# EAGLE board CT_schematic (EAGLE 7.6.0)

Size 100 x 80 mm. Coordinates in mm from the lower left corner, seen from the top.
Outline: 0,0 100,0 100,80 0,80 0,0
Copper layers (1*16): Top 0.035mm / dielectric 1.5mm / Bottom 0.035mm
Design rules "default": minimum track width 10mil, minimum drill 24mil, track to track 8mil, track to pad 8mil, pad to pad 8mil, via to via 8mil, smd to smd 8mil, copper to edge 40mil, drill to drill 8mil, minimum pad ring 10mil, minimum via ring 8mil, stop-mask expansion 4mil, vias tented up to drill 0mil, thermal gap 10mil

## Footprints (pad centres in the part's own frame; a part is rotated, then mirrored left to right if it is on the bottom)
C0603 = smd 0.8 x 0.8: 1 -0.762,0; 2 0.762,0
C0402 = smd 0.5 x 0.5: 1 -0.508,0; 2 0.508,0
C1210 = smd 1.2 x 2.5: 1 -1.524,0; 2 1.524,0
EXV-9H = smd 3.505 x 1.676: 1 -2.857,0; 2 2.857,0
PJ-037B_PACKAGE = drill 3.7 square: 1 12,0 | drill 3.2 square: 2 6,0
R0603 = smd 0.8 x 0.8: 1 -0.762,0; 2 0.762,0
WLCSP104 = smd 0.229 x 0.229: A1 -1.6,2.2; A2 -1.2,2.2; A3 -0.8,2.2; A4 -0.4,2.2; A5 0,2.2; A6 0.4,2.2; A7 0.8,2.2; A8 1.2,2.2; A9 1.6,2.2; B1 -1.6,1.8; B2 -1.2,1.8; B3 -0.8,1.8; B4 -0.4,1.8; B5 0,1.8; B6 0.4,1.8; B7 0.8,1.8; B8 1.2,1.8; B9 1.6,1.8; C1 -1.6,1.4; C2 -1.2,1.4; C3 -0.8,1.4; C4 -0.4,1.4; C5 0,1.4; C6 0.4,1.4; C7 0.8,1.4; C8 1.2,1.4; C9 1.6,1.4; D1 -1.6,1; D2 -1.2,1; D3 -0.8,1; D4 -0.4,1; D5 0,1; D6 0.4,1; D7 0.8,1; D8 1.2,1; D9 1.6,1; E1 -1.6,0.6; E2 -1.2,0.6; E3 -0.8,0.6; E4 -0.4,0.6; E6 0.4,0.6; E7 0.8,0.6; E8 1.2,0.6; E9 1.6,0.6; F1 -1.6,0.2; F2 -1.2,0.2; F3 -0.8,0.2; F4 -0.4,0.2; F6 0.4,0.2; F7 0.8,0.2; F8 1.2,0.2; F9 1.6,0.2; G1 -1.6,-0.2; G2 -1.2,-0.2; G3 -0.8,-0.2; G4 -0.4,-0.2; G6 0.4,-0.2; G7 0.8,-0.2; G8 1.2,-0.2; G9 1.6,-0.2; H1 -1.6,-0.6; H2 -1.2,-0.6; H3 -0.8,-0.6; H4 -0.4,-0.6; H6 0.4,-0.6; H7 0.8,-0.6; H8 1.2,-0.6; H9 1.6,-0.6; J1 -1.6,-1; J2 -1.2,-1; J3 -0.8,-1; J4 -0.4,-1; J5 0,-1; J6 0.4,-1; J7 0.8,-1; J8 1.2,-1; J9 1.6,-1; K1 -1.6,-1.4; K2 -1.2,-1.4; K3 -0.8,-1.4; K4 -0.4,-1.4; K5 0,-1.4; K6 0.4,-1.4; K7 0.8,-1.4; K8 1.2,-1.4; K9 1.6,-1.4; L1 -1.6,-1.8; L2 -1.2,-1.8; L3 -0.8,-1.8; L4 -0.4,-1.8; L5 0,-1.8; L6 0.4,-1.8; L7 0.8,-1.8; L8 1.2,-1.8; L9 1.6,-1.8; M1 -1.6,-2.2; M2 -1.2,-2.2; M3 -0.8,-2.2; M4 -0.4,-2.2; M5 0,-2.2; M6 0.4,-2.2; M7 0.8,-2.2; M8 1.2,-2.2; M9 1.6,-2.2
SAMTEC_FTSH-105-01-L-DV-K = smd 0.762 x 2.794: 1 -2.54,-2.032; 2 -2.54,2.032; 3 -1.27,-2.032; 4 -1.27,2.032; 5 0,-2.032; 6 0,2.032; 7 1.27,-2.032; 8 1.27,2.032; 9 2.54,-2.032; 10 2.54,2.032
SOIC-8 = smd 1.6 x 0.6: 1 -2.7,1.905 | smd 1.55 x 0.6: 2 -2.7,0.635; 3 -2.7,-0.635; 4 -2.7,-1.905; 5 2.7,-1.905; 6 2.7,-0.635; 7 2.7,0.635; 8 2.7,1.905
ASEK = smd 1.4 x 1: 1 -1.1,-0.8; 2 1.1,-0.8; 3 1.1,0.8; 4 -1.1,0.8
ASFL1 = smd 1.7 x 1.5: 1 -1.27,-1.1; 2 1.27,-1.1; 3 1.27,1.1; 4 -1.27,1.1
WSON-8 = smd 0.3 x 0.6: 1 -0.75,0; 2 0.05,0; 3 0.85,0; 4 1.65,0; 5 1.65,3.8; 6 0.85,3.8; 7 0.05,3.8; 8 -0.75,3.8 | smd 3 x 2.6: PAD 0.45,1.9
SON-6 = smd 0.55 x 0.3: 1 -0.355,0.5 | smd 0.52 x 0.3: 2 -0.37,0; 3 -0.37,-0.5; 4 0.37,-0.5; 5 0.37,0; 6 0.37,0.5
SW_4-1437565-2 = smd 1.4 x 2.1: 1 -2.23,4.55; 2 -2.23,-4.55; 3 2.23,4.55; 4 2.23,-4.55
LGM67K-G1J2-24-Z = smd 0.8 x 1.4: A -2,0; C 0,0
NC7SZ125M5X = smd 1.3 x 0.7: 1 -1.3,0.95; 2 -1.3,0; 3 -1.3,-0.95; 4 1.3,-0.95; 5 1.3,0.95
DUMMY_PACKAGE_121 = drill 0.3: 1 0,-1; 2 1.5,-1; 3 3,-1

## Placement (x,y rotation side)
C1  1e-07  [C0603]  -58.42,53.34 0 top  (outside the outline)
C2  1e-07  [C0603]  -62.23,53.34 0 top  (outside the outline)
C3  1e-07  [C0603]  -15.24,58.42 0 top  (outside the outline)
C4  1e-07  [C0603]  -19.05,58.42 0 top  (outside the outline)
C5  1e-07  [C0603]  -22.86,58.42 0 top  (outside the outline)
C6  1e-07  [C0603]  -26.67,58.42 0 top  (outside the outline)
C7  1e-07  [C0603]  -30.48,58.42 0 top  (outside the outline)
C8  4.7e-06  [C0603]  -54.61,53.34 0 top  (outside the outline)
C9  1e-07  [C0603]  -34.29,58.42 0 top  (outside the outline)
C10  1e-08  [C0603]  -38.1,58.42 0 top  (outside the outline)
C11  1e-06  [C0603]  -41.91,58.42 0 top  (outside the outline)
C12  1e-07  [C0402]  -26.67,63.5 0 top  (outside the outline)
C13  1e-08  [C0402]  -30.48,63.5 0 top  (outside the outline)
C14  1e-08  [C0402]  -34.29,63.5 0 top  (outside the outline)
C15  1e-08  [C0402]  -38.1,63.5 0 top  (outside the outline)
C16  1e-08  [C0402]  -41.91,63.5 0 top  (outside the outline)
C17  1e-05  [C1210]  -29.21,46.99 0 top  (outside the outline)
C18  1e-05  [C1210]  -35.56,46.99 0 top  (outside the outline)
C19  1e-07  [C0402]  -45.72,63.5 0 top  (outside the outline)
C20  0.0001  [EXV-9H]  -38.1,39.37 0 top  (outside the outline)
C21  0.0001  [EXV-9H]  -49.53,39.37 0 top  (outside the outline)
C22  1e-08  [C0402]  -49.53,63.5 0 top  (outside the outline)
C23  1e-08  [C0402]  -53.34,63.5 0 top  (outside the outline)
J1  PJ-037B  [PJ-037B_PACKAGE]  -57.15,7.62 0 top  (outside the outline)
R2  1000.0  [R0603]  -45.72,58.42 0 top  (outside the outline)
R4  4700.0  [R0603]  -49.53,58.42 0 top  (outside the outline)
R5  2200.0  [R0603]  -53.34,58.42 0 top  (outside the outline)
R6  2200.0  [R0603]  -57.15,58.42 0 top  (outside the outline)
R7  10000.0  [R0603]  -15.24,53.34 0 top  (outside the outline)
R8  10000.0  [R0603]  -20.32,53.34 0 top  (outside the outline)
R9  10000.0  [R0603]  -25.4,53.34 0 top  (outside the outline)
R10  10000.0  [R0603]  -30.48,53.34 0 top  (outside the outline)
R11  10000.0  [R0603]  -35.56,53.34 0 top  (outside the outline)
R12  5.0  [R0603]  -60.96,58.42 0 top  (outside the outline)
R13  10000.0  [R0603]  -40.64,53.34 0 top  (outside the outline)
R14  100000.0  [R0603]  -53.34,45.72 0 top  (outside the outline)
R15  2231.0  [R0603]  -15.24,63.5 0 top  (outside the outline)
R16  1000.0  [R0603]  -19.05,63.5 0 top  (outside the outline)
R17  10000.0  [R0603]  -45.72,53.34 0 top  (outside the outline)
R18  10000.0  [R0603]  -50.8,53.34 0 top  (outside the outline)
R19  9100.0  [R0603]  -22.86,63.5 0 top  (outside the outline)
R20  680000.0  [R0603]  -58.42,45.72 0 top  (outside the outline)
R21  120000.0  [R0603]  -63.5,45.72 0 top  (outside the outline)
U1  STM32L162VDY6X  [WLCSP104]  -53.34,30.48 0 top  (outside the outline)
U2  FTSH-105-01-L-DV-K  [SAMTEC_FTSH-105-01-L-DV-K]  -35.56,7.62 0 top  (outside the outline)
U3  M24M02-DRMN6TP  [SOIC-8]  -44.45,19.05 0 top  (outside the outline)
U4  ASEK-32.768KHz-ECST  [ASEK]  -29.21,39.37 0 top  (outside the outline)
U5  ASFL1-25MHZ-NCS  [ASFL1]  -46.99,30.48 0 top  (outside the outline)
U6  LP3878SDX-ADJ/NOPB  [WSON-8]  -30.48,29.21 0 top  (outside the outline)
U7  TPS3895ADRYR  [SON-6]  -13.97,67.31 0 top  (outside the outline)
U8  4-1437565-2  [SW_4-1437565-2]  -27.94,20.32 0 top  (outside the outline)
U9  Q65110A2395  [LGM67K-G1J2-24-Z]  -17.78,46.99 0 top  (outside the outline)
U10  nc7sz125m5x  [NC7SZ125M5X]  -40.64,45.72 0 top  (outside the outline)
U11  nc7sz125m5x  [NC7SZ125M5X]  -46.99,45.72 0 top  (outside the outline)
U12  Dummy  [DUMMY_PACKAGE_121]  -59.69,63.5 0 top  (outside the outline)

## Library data of the parts
C1-C23 J1 R2 R4-R21 U1-U12 = circuit_tree

## Nets
CLK_U1_D8: U1.D8 U4.3
CLK_U1_F8: U1.F8 U5.3
GND: C1.2 C2.2 C3.2 C4.2 C5.2 C6.2 C7.2 C8.2 C9.2 C10.2 C11.2 C12.2 C13.2 C14.2 C15.2 C16.2 C17.2 C18.2 C19.2 C20.2 C21.2 C22.2 C23.2 J1.2 R2.2 R7.2 R11.2 R12.2 R13.2 R16.2 R19.2 R21.2 U1.A1 U1.C7 U1.D2 U1.E8 U1.H8 U1.J9 U1.K8 U1.L2 U1.M1 U2.3 U2.5 U3.4 U4.2 U5.2 U6.3 U6.PAD U7.2 U9.C U10.2 U10.3 U11.1 U11.3 U12.1
NET_U1_A7: R7.1 U1.A7
NET_U1_B6: R6.1 U1.B6 U3.5
NET_U1_C5: R5.1 U1.C5 U3.6
NET_U1_E7: C9.1 U1.E7
NET_U1_F7: R4.1 U1.F7 U11.4
NET_U1_M7: U9.A
NET_U1_M8: U8.3 U8.4
NET_U2_9: R12.1 U2.9
NET_U3_3: R13.1 U3.3
NET_U6_1: C16.1 U6.1
NET_U6_6: R15.2 R16.1 U6.6
NET_U6_8: R14.1 U6.8
NET_U7_1: R18.1 R19.1 U7.1
NET_U7_3: R20.2 R21.1 U7.3
NET_U7_4: R17.1 U7.4 U10.4 U11.2
NET_U8_1: R2.1 U8.1 U8.2
PROC_SYS_JTCK_SWCLK: R11.1 U1.D3 U2.4
PROC_SYS_JTDI: R9.1 U1.B1 U2.8
PROC_SYS_JTDO_TRACESWO: U1.B5 U2.6
PROC_SYS_JTMS_SWDIO: R10.1 U1.E3 U2.2
PROC_TIM10_CH1: U1.B7 U12.2
PROC_TIM11_CH1: U1.A8 U12.3
RST_OUT_U2_JTAG_RST_B: R8.1 U2.10 U10.1
VCC_S1_12V4: C17.1 C20.1 C21.1 J1.1 R14.2 U6.4
VCC_TIER1_3V3: C1.1 C2.1 C3.1 C4.1 C5.1 C6.1 C7.1 C8.1 C10.1 C11.1 C12.1 C13.1 C14.1 C15.1 C18.1 C19.1 C22.1 C23.1 R4.2 R5.2 R6.2 R8.2 R9.2 R10.2 R15.1 R17.2 R18.2 R20.1 U1.A9 U1.B8 U1.C1 U1.E9 U1.G6 U1.G7 U1.K3 U1.L8 U1.M9 U2.1 U3.8 U4.4 U5.4 U6.5 U7.6 U10.5 U11.5

## Tracks (layer width: path | path; a pad name or v marks a point on that pad's centre or on a via)
CLK_U1_D8  (1 unrouted)
CLK_U1_F8  (1 unrouted)
GND  (54 unrouted)
NET_U1_A7  (1 unrouted)
NET_U1_B6  (2 unrouted)
NET_U1_C5  (2 unrouted)
NET_U1_E7  (1 unrouted)
NET_U1_F7  (2 unrouted)
NET_U1_M8  (1 unrouted)
NET_U2_9  (1 unrouted)
NET_U3_3  (1 unrouted)
NET_U6_1  (1 unrouted)
NET_U6_6  (2 unrouted)
NET_U6_8  (1 unrouted)
NET_U7_1  (2 unrouted)
NET_U7_3  (2 unrouted)
NET_U7_4  (3 unrouted)
NET_U8_1  (2 unrouted)
PROC_SYS_JTCK_SWCLK  (2 unrouted)
PROC_SYS_JTDI  (2 unrouted)
PROC_SYS_JTDO_TRACESWO  (1 unrouted)
PROC_SYS_JTMS_SWDIO  (2 unrouted)
PROC_TIM10_CH1  (1 unrouted)
PROC_TIM11_CH1  (1 unrouted)
RST_OUT_U2_JTAG_RST_B  (2 unrouted)
VCC_S1_12V4  (5 unrouted)
VCC_TIER1_3V3  (44 unrouted)